# EAGLE board Board1 (EAGLE 4.16)
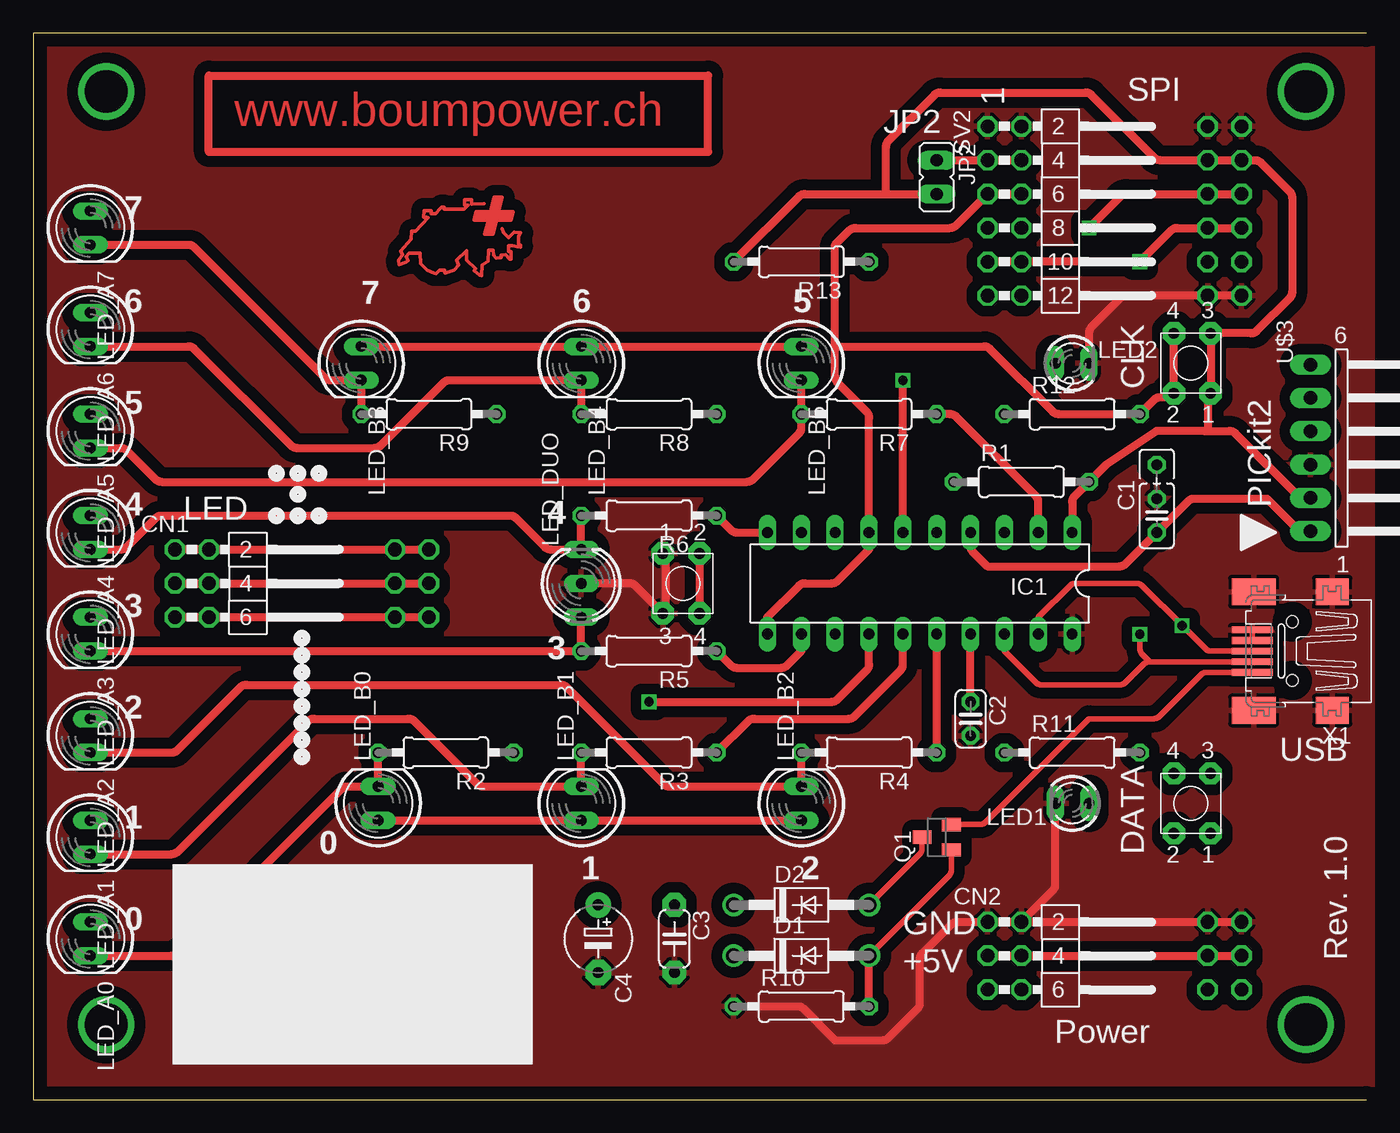
[diagram p0: board, top side]
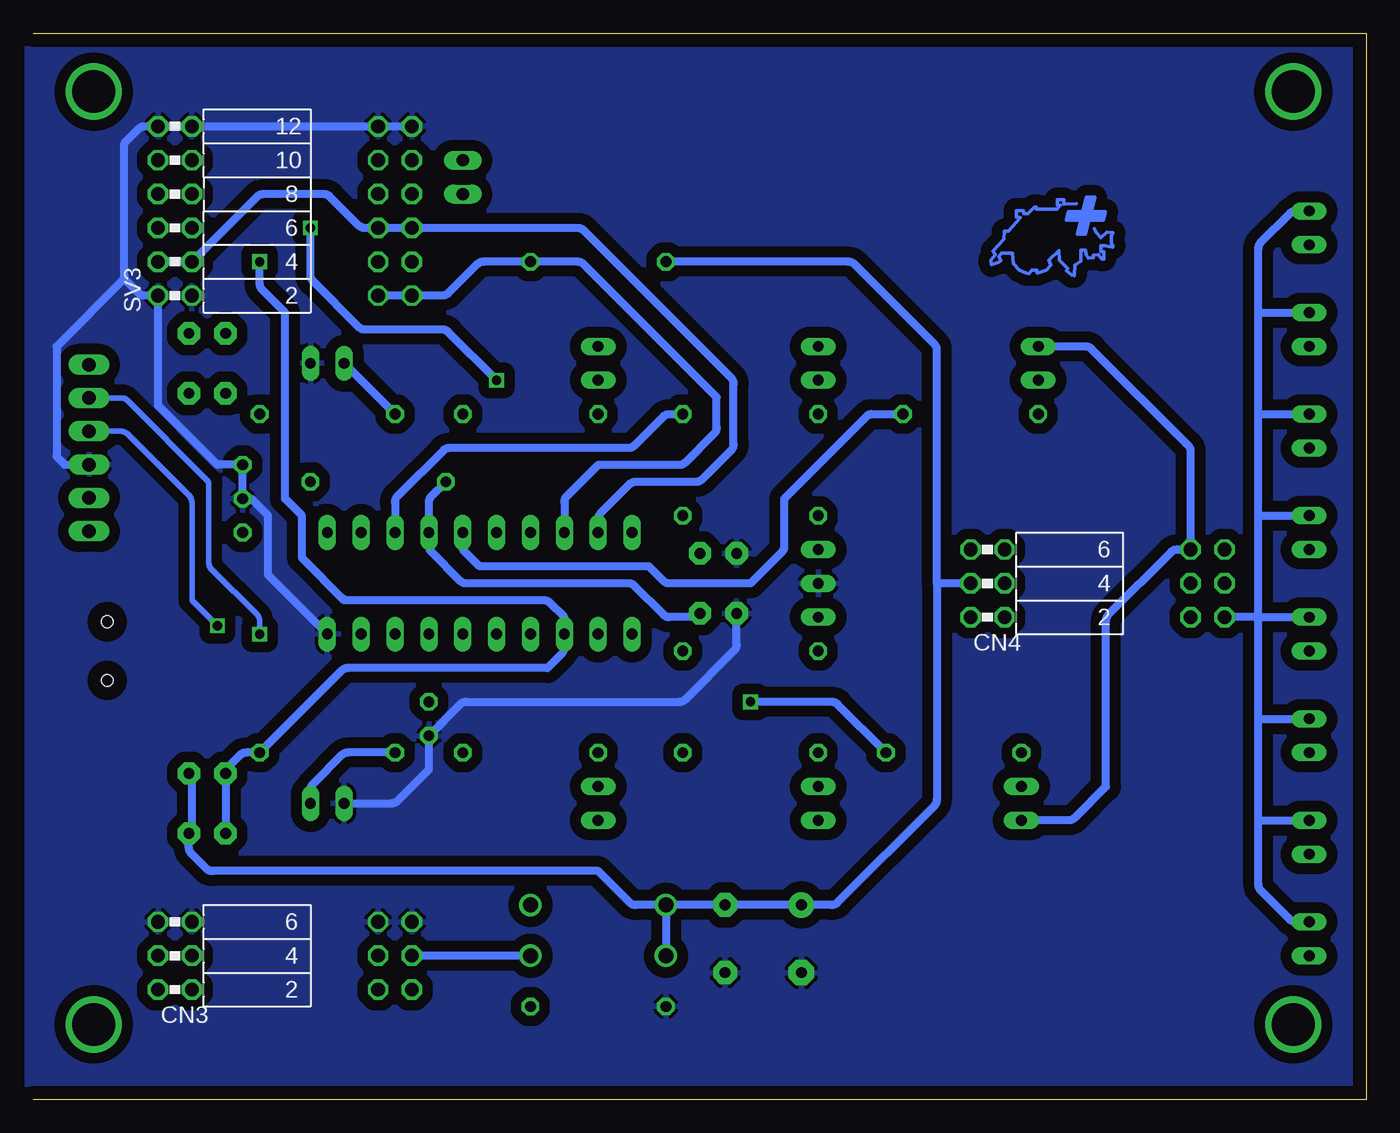
[diagram p1: board, bottom side, seen from below]

Size 100 x 80 mm. Coordinates in mm from the lower left corner, seen from the top.
Outline: 100,0 0,0 0,80 100,80
Copper layers (1*16): Top 0.035mm / dielectric 1.5mm / Bottom 0.035mm
Design rules "Olimex 10mils": minimum track width 10mil, minimum drill 24mil, track to track 10mil, track to pad 10mil, pad to pad 10mil, via to via 10mil, smd to smd 10mil, copper to edge 40mil, drill to drill 10mil, minimum pad ring 10mil, minimum via ring 8mil, stop-mask expansion 0mil, vias tented up to drill 0mil, thermal gap 10mil

## Footprints (pad centres in the part's own frame; a part is rotated, then mirrored left to right if it is on the bottom)
C025_050-025X075 = drill 0.813 octagon: 1 -1.27,0; 2 1.27,0; 3 3.81,0
C025-024X044 = drill 0.813 octagon: 1 -1.27,0; 2 1.27,0
C050-024X044 = drill 0.813 pad 1.778 octagon: 1 -2.54,0; 2 2.54,0
E5-5 = drill 0.813 pad 1.905 round: + -2.54,0 | drill 0.813 pad 1.905 octagon: - 2.54,0
JPM = drill 0.813 pad 1.676 octagon: P$1 -1.5,2.25; P$2 1.25,2.25; P$3 -1.5,-2.25; P$4 1.25,-2.25
MA03-2W = drill 1.016 octagon: 1 -2.54,-1.27; 2 -2.54,1.27; 3 0,-1.27; 4 0,1.27; 5 2.54,-1.27; 6 2.54,1.27
FE03-2W = drill 1.016 octagon: 1 -2.54,1.27; 2 -2.54,-1.27; 3 0,1.27; 4 0,-1.27; 5 2.54,1.27; 6 2.54,-1.27
DO41-10 = drill 1.118 round: A 5.08,0; C -5.08,0
DIL20 = drill 0.813 long: 1 -11.43,-3.81; 2 -8.89,-3.81; 3 -6.35,-3.81; 4 -3.81,-3.81; 5 -1.27,-3.81; 6 1.27,-3.81; 7 3.81,-3.81; 8 6.35,-3.81; 9 8.89,-3.81; 10 11.43,-3.81; 11 11.43,3.81; 12 8.89,3.81; 13 6.35,3.81; 14 3.81,3.81; 15 1.27,3.81; 16 -1.27,3.81; 17 -3.81,3.81; 18 -6.35,3.81; 19 -8.89,3.81; 20 -11.43,3.81
JP1 = drill 0.914 long: 1 0,-1.27; 2 0,1.27
LED3MM = drill 0.813 long: A -1.27,0; K 1.27,0
LED5MM = drill 0.813 long: A -1.27,0; K 1.27,0
DUOLED5MM = drill 0.813 long: AG -2.54,0; AR 2.54,0; K 0,0
SOT23 = smd 1 x 1.4: 1 -0.95,-1.1; 2 0.95,-1.1; 3 0,1.1
0207/10 = drill 0.813 octagon: 1 -5.08,0; 2 5.08,0
MA06-2W = drill 1.016 octagon: 1 -6.35,-1.27; 2 -6.35,1.27; 3 -3.81,-1.27; 4 -3.81,1.27; 5 -1.27,-1.27; 6 -1.27,1.27; 7 1.27,-1.27; 8 1.27,1.27; 9 3.81,-1.27; 10 3.81,1.27; 11 6.35,-1.27; 12 6.35,1.27
FE06-2W = drill 1.016 octagon: 1 -6.35,1.27; 2 -6.35,-1.27; 3 -3.81,1.27; 4 -3.81,-1.27; 5 -1.27,1.27; 6 -1.27,-1.27; 7 1.27,1.27; 8 1.27,-1.27; 9 3.81,1.27; 10 3.81,-1.27; 11 6.35,1.27; 12 6.35,-1.27
PICKIT2 = drill 1.016 long: 1 6.25,-6.25; 2 3.75,-6.25; 3 1.25,-6.25; 4 -1.25,-6.25; 5 -3.75,-6.25; 6 -6.25,-6.25
32005-201 = smd 3.1 x 0.5: 1 3,1.6; 2 3,0.8; 3 3,0; 4 3,-0.8; 5 3,-1.6 | smd 2.5 x 2: M1 -3,-4.45; M2 -3,4.45 | smd 3.3 x 2: M3 2.9,4.45; M4 2.9,-4.45 | hole 0.9: 0,2.2; 0,-2.2

## Placement (x,y rotation side)
C1  0.1 uF  [C025_050-025X075]  84.29,43.81 90 top
C2  470 nF  [C025-024X044]  70.32,28.57 270 top
C3  100nf  [C050-024X044]  48.09,12.06 270 top
C4  10uF  [E5-5]  42.38,12.06 270 top
CLK  [JPM]  86.83,55.24 180 top
CN1  [MA03-2W]  11.9,38.73 270 top
CN2  [MA03-2W]  72.86,10.79 270 top
CN3  [FE03-2W]  89.37,10.79 90 bottom
CN4  [FE03-2W]  28.41,38.73 90 bottom
D1  1N5817  [DO41-10]  57.62,10.79 0 top
D2  1N5817  [DO41-10]  57.62,14.6 0 top
DATA  [JPM]  86.83,22.22 180 top
IC1  MICROCHIP_PIC18F1XK50I/P  [DIL20]  66.51,38.73 180 top
JP2  [JP1]  67.78,69.21 180 top
LED1  [LED3MM]  77.94,22.22 180 top
LED2  [LED3MM]  77.94,55.24 0 top
LED_A0  [LED5MM]  4.28,12.06 270 top
LED_A1  [LED5MM]  4.28,19.68 270 top
LED_A2  [LED5MM]  4.28,27.3 270 top
LED_A3  [LED5MM]  4.28,34.92 270 top
LED_A4  [LED5MM]  4.28,42.54 270 top
LED_A5  [LED5MM]  4.28,50.16 270 top
LED_A6  [LED5MM]  4.28,57.78 270 top
LED_A7  [LED5MM]  4.28,65.4 270 top
LED_B0  [LED5MM]  25.87,22.22 90 top
LED_B1  [LED5MM]  41.11,22.22 90 top
LED_B2  [LED5MM]  57.62,22.22 90 top
LED_B3  [LED5MM]  24.6,55.24 270 top
LED_B4  [LED5MM]  41.11,55.24 270 top
LED_B5  [LED5MM]  57.62,55.24 270 top
LED_DUO  [DUOLED5MM]  41.11,38.73 90 top
Q1  BSS84  [SOT23]  67.78,19.68 90 top
R1  10K  [0207/10]  74.13,46.35 0 top
R2  [0207/10]  30.95,26.03 180 top
R3  [0207/10]  46.19,26.03 180 top
R4  [0207/10]  62.7,26.03 180 top
R5  [0207/10]  46.19,33.65 180 top
R6  [0207/10]  46.19,43.81 180 top
R7  [0207/10]  62.7,51.43 180 top
R8  [0207/10]  46.19,51.43 180 top
R9  [0207/10]  29.68,51.43 180 top
R10  33k  [0207/10]  57.62,6.98 0 top
R11  470  [0207/10]  77.94,26.03 0 top
R12  470  [0207/10]  77.94,51.43 0 top
R13  33K  [0207/10]  57.62,62.86 180 top
RESET  [JPM]  48.73,38.73 0 top
SV2  [MA06-2W]  72.86,66.67 270 top
SV3  [FE06-2W]  89.37,66.67 90 bottom
U$1  SUISSE  [SUISSE]  23.33,64.77 0 bottom
U$3  PIC-ICSPMICROCHIP  [PICKIT2]  102.07,48.89 270 top
U$15  SUISSE  [SUISSE]  32.22,64.77 0 top
X1  USB  [32005-201]  94.45,33.65 180 top

## Library data of the parts
C1-C4 R1-R13 = rcl
CLK DATA RESET = BP_Switches
CN1-CN4 SV2 SV3 = untitled
D1 D2 = diode
IC1 = PIC18F1xK50
JP2 = jumper
LED1 LED2 LED_A0 LED_A1-LED_A7 LED_B0 LED_B1-LED_B5 = BP_LED
LED_DUO = led
Q1 = transistor-small-signal
U$1 U$15 = BP_Symbol
U$3 = GB-Extentions
X1 = con-cypressindustries

## Nets
ALIM: CN2.3 CN2.4 CN3.3 CN3.4 D1.A Q1.1 R10.2
CLK: CLK.P$2 CLK.P$4 IC1.7 IC1.11 R12.2 SV2.5 SV2.6
CLK-OUT: IC1.6 SV3.7 SV3.8
D+: IC1.19 U$3.4 X1.3
D-: IC1.18 U$3.5 X1.2
MCLR#: C1.1 IC1.4 R1.1 RESET.P$2 RESET.P$4 U$3.1
N$1: D2.A Q1.3
N$2: JP2.1 SV2.3 SV2.4
N$3: LED1.A R11.1
N$4: Q1.2 X1.1
N$5: LED2.A R12.1
N$15: CN1.1 CN1.2 CN4.5 CN4.6 LED_B0.A LED_B1.A LED_B2.A LED_B3.A LED_B4.A LED_B5.A
N$16: CN1.5 CN1.6 CN4.1 CN4.2 LED_A0.A LED_A1.A LED_A2.A LED_A3.A LED_A4.A LED_A5.A LED_A6.A LED_A7.A
OUT0: LED_A0.K LED_B0.K R2.2
OUT1: LED_A1.K LED_B1.K R3.2
OUT2: LED_A2.K LED_B2.K R4.2
OUT3: LED_A3.K LED_DUO.AG R5.2
OUT4: LED_A4.K LED_DUO.AR R6.2
OUT5: LED_A5.K LED_B5.K R7.2
OUT6: LED_A6.K LED_B4.K R8.2
OUT7: LED_A7.K LED_B3.K R9.2
PE: C1.2 C2.2 C3.2 C4.- CN2.1 CN2.2 CN3.5 CN3.6 IC1.20 LED1.K LED2.K LED_DUO.K R10.1 RESET.P$1 RESET.P$3 SV2.1 SV2.2 SV3.1 SV3.2 SV3.11 SV3.12 U$3.3 X1.4 X1.5 X1.M1 X1.M2 X1.M3 X1.M4
Q0: IC1.14 R2.1
Q1: IC1.15 R3.1
Q2: IC1.16 R4.1
Q3: IC1.12 R5.1
Q4: IC1.10 R6.1
Q5: IC1.2 R7.1
Q6: IC1.3 R8.1
Q7: IC1.5 R9.1
SI: DATA.P$2 DATA.P$4 IC1.13 R11.2 SV2.9 SV2.10 SV3.5 SV3.6
SO: IC1.9 SV2.7 SV2.8 SV3.3 SV3.4
SS#: IC1.8 R13.1 SV2.11 SV2.12
VDD: C3.1 C4.+ CLK.P$1 CLK.P$3 CN1.3 CN1.4 CN4.3 CN4.4 D1.C D2.C DATA.P$1 DATA.P$3 IC1.1 JP2.2 R1.2 R13.2 SV3.9 SV3.10 U$3.2
VUSB: C2.1 IC1.17

## Tracks (layer width: path | path; a pad name or v marks a point on that pad's centre or on a via)
ALIM
  Top 0.406: Q1.1 68.88,17.23 arc-45 68.69,16.78 D1.A
  Top 0.61: CN2.3 CN2.4 CN3.4 CN3.3 | R10.2 D1.A
  Bottom 0.61: D1.A CN2.3
CLK
  Top 0.61: SV2.6 SV2.5 69.24,65.59 arc-45 68.79,65.4 61.69,65.4 arc45 61.24,65.21 60.16,64.13 60.16,56.51 | 60.16,56.51 60.16,54.23 arc45 60.35,53.78 62.51,51.62 arc-45 62.7,51.17 IC1.7 62.7,41.27 60.35,38.92 arc-45 59.9,38.73 57.88,38.73 arc45 57.43,38.54 55.08,36.19 IC1.11 | 60.16,56.51 71.33,56.51 arc-45 71.78,56.32 76.48,51.62 arc45 76.93,51.43 R12.2 84.1,52.51 arc-45 84.55,52.7 85.56,52.7 85.56,52.94 arc-45 CLK.P$2 arc-45 85.56,53.04 85.56,57.54 | 85.56,57.54 85.56,57.78 | 85.56,57.54 arc45 CLK.P$4
CLK-OUT  (via drill 0.7)
  Top 0.61: SV3.7 SV3.8 82.01,67.94 arc45 81.56,67.75 v79.21,65.4 | IC1.6 v65.24,53.97
  Bottom 0.61: v65.24,53.97 68.86,57.59 arc-45 69.31,57.78 75.14,57.78 arc45 75.59,57.97 79.02,61.4 arc45 79.21,61.85 v79.21,65.4
D+  (via drill 0.7)
  Top 0.406: X1.3 88.36,33.65 arc-45 87.91,33.84 v86.19,35.55 83.21,38.54 arc45 82.76,38.73 78.2,38.73 arc45 77.75,38.54 75.4,36.19 IC1.19
  Bottom 0.406: U$3.4 93.42,50.14 arc45 92.97,49.95 88.29,45.27 arc45 88.1,44.82 88.1,37.46 v86.19,35.55
D-  (via drill 0.7)
  Top 0.406: 83.75,32.85 X1.2 | 83.75,32.85 arc45 83.3,32.66 81.94,31.3 arc-45 81.49,31.11 75.66,31.11 arc-45 75.21,31.3 72.86,33.65 IC1.18 | 83.75,32.85 83.21,33.4 arc-45 83.02,33.85 v83.02,34.92
  Bottom 0.406: U$3.5 93.38,52.64 arc45 92.93,52.45 87.02,46.54 arc45 86.83,46.09 86.83,40.26 arc-45 86.64,39.81 83.21,36.38 arc45 83.02,35.93 v83.02,34.92
MCLR#
  Top 0.61: 50,41.03 50,41.27 | 50,41.03 arc-45 RESET.P$2 | RESET.P$4 arc45 50,36.53 50,41.03 | IC1.4 70.32,41.53 arc45 70.51,41.08 71.59,40 81.49,40 arc45 81.94,40.19 C1.1 86.64,44.89 arc-45 87.09,45.08 92.55,45.08 94.9,42.73 arc45 95.35,42.54 95.72,42.54 U$3.1
  Bottom 0.61: RESET.P$4 arc-45 50,36.43 50,36.19 52.28,36.19 arc45 52.73,36.38 54.89,38.54 arc-45 55.34,38.73 67.52,38.73 arc45 67.97,38.92 70.13,41.08 arc45 70.32,41.53 IC1.4 70.32,44.82 arc45 70.13,45.27 R1.1
N$1
  Top 0.406: Q1.3 66.68,18.84 arc-45 66.49,18.39 D2.A
N$2
  Top 0.61: SV2.4 SV2.3 JP2.1
N$3
  Bottom 0.61: R11.1 76.41,26.03 arc-45 76.86,25.84 79.02,23.68 arc-45 79.21,23.23 LED1.A
N$4
  Top 0.406: X1.1 88.03,32.05 arc45 87.58,31.86 84.48,28.76 arc-45 84.03,28.57 79.21,28.57 71.46,20.82 arc-45 71.01,20.63 Q1.2
N$5
  Bottom 0.61: R12.1 LED2.A
N$6  (via drill 3.2 pad 0.41)
  other vias: 5.47,5.63
N$7  (via drill 3.2 pad 0.41)
  other vias: 5.47,75.63
N$8  (via drill 3.2 pad 0.41)
  other vias: 95.47,75.63
N$9  (via drill 3.2 pad 0.41)
  other vias: 95.47,5.63
N$10
  Top 0.61: 13.17,71.11 50.63,71.11 50.63,76.83 13.17,76.83 13.17,71.11
N$15
  Top 0.61: CN4.5 CN4.6 CN1.2 CN1.1 | LED_B3.A LED_B4.A LED_B5.A | LED_B0.A LED_B1.A LED_B2.A
  Bottom 0.61: LED_B3.A 21.05,56.51 arc45 20.6,56.32 13.36,49.08 arc45 13.17,48.63 CN1.2 14.18,41.27 arc-45 14.63,41.08 19.33,36.38 arc-45 19.52,35.93 19.52,23.49 21.87,21.14 arc45 22.32,20.95 LED_B0.A
N$16
  Top 0.61: CN1.5 CN1.6 CN4.2 CN4.1
  Bottom 0.61: 8.09,36.19 LED_A3.A | 8.09,36.19 CN1.5 | LED_A7.A 5.29,66.67 arc-45 5.74,66.48 7.9,64.32 arc-45 8.09,63.87 8.09,59.05 | 8.09,36.19 8.09,43.81 | 8.09,43.81 8.09,51.43 | 8.09,51.43 8.09,59.05 | 8.09,59.05 LED_A6.A | 8.09,51.43 LED_A5.A | 8.09,43.81 LED_A4.A | LED_A0.A 5.29,13.33 arc45 5.74,13.52 7.9,15.68 arc45 8.09,16.13 8.09,20.95 | 8.09,20.95 8.09,28.57 | 8.09,28.57 8.09,36.19 | 8.09,20.95 LED_A1.A | 8.09,28.57 LED_A2.A
OUT0
  Top 0.61: LED_A0.K 10.37,10.79 arc45 10.82,10.98 23.14,23.3 arc-45 23.59,23.49 LED_B0.K R2.2
OUT1
  Top 0.61: R3.2 LED_B1.K 33.75,23.49 arc-45 33.3,23.68 28.6,28.38 arc45 28.15,28.57 21.05,28.57 arc45 20.6,28.38 10.82,18.6 arc-45 10.37,18.41 LED_A1.K
OUT2
  Top 0.61: R4.2 LED_B2.K 47.72,23.49 arc-45 47.27,23.68 40.03,30.92 arc45 39.58,31.11 15.97,31.11 arc45 15.52,30.92 10.82,26.22 arc-45 10.37,26.03 LED_A2.K
OUT3
  Top 0.61: LED_A3.K R5.2 LED_DUO.AG
OUT4
  Top 0.61: LED_A4.K 6.56,41.27 arc45 7.01,41.46 9.17,43.62 arc-45 9.62,43.81 35.77,43.81 arc-45 36.22,43.62 38.38,41.46 arc45 38.83,41.27 LED_DUO.AR R6.2
OUT5
  Top 0.61: LED_A5.K 6.56,48.89 arc-45 7.01,48.7 9.17,46.54 arc45 9.62,46.35 53.55,46.35 arc45 54,46.54 57.43,49.97 arc45 57.62,50.42 R7.2 LED_B5.K
OUT6
  Top 0.61: R8.2 LED_B4.K 31.21,53.97 arc45 30.76,53.78 26.06,49.08 arc-45 25.61,48.89 19.78,48.89 arc-45 19.33,49.08 12.09,56.32 arc45 11.64,56.51 LED_A6.K
OUT7
  Top 0.61: R9.2 LED_B3.K 22.32,53.97 arc-45 21.87,54.16 12.09,63.94 arc45 11.64,64.13 LED_A7.K
PE
  Top 0.406: 91.47,34.45 X1.4 91.45,35.24 | 91.47,35.25 X1.5 91.45,35.24 | 91.45,35.24 91.59,35.24
  Top 0.61: LED_DUO.K 44.72,38.73 arc-45 45.17,38.54 RESET.P$3 47.27,36.52 arc45 47.46,36.97 47.46,41.27 arc-45 47.42,41.17 RESET.P$1 | SV3.1 SV3.2 82.01,60.32 arc45 81.56,60.13 79.4,57.97 arc45 79.21,57.52 LED2.K | CN2.2 CN2.1 69.31,13.33 arc45 68.86,13.14 66.7,10.98 arc45 66.51,10.53 66.51,7.24 arc-45 66.32,6.79 64.16,4.63 arc-45 63.71,4.44 60.16,4.44 57.81,6.79 arc45 57.36,6.98 R10.1 | CN3.5 CN3.6 CN2.2 | CN2.2 76.48,15.68 arc45 76.67,16.13 LED1.K
  Bottom 0.61: RESET.P$3 47.23,34.14 arc45 47.42,33.69 51.08,30.03 arc45 51.53,29.84 67.52,29.84 arc-45 67.97,29.65 C2.2 70.32,24.76 72.67,22.41 arc45 73.12,22.22 LED1.K | SV2.1 SV2.2 SV3.12 SV3.11 91.65,73.02 arc-45 92.1,72.83 93.18,71.75 93.18,61.85 arc-45 92.99,61.4 | 92.99,61.4 91.91,60.32 SV3.1 90.64,52.07 86.2,47.63 84.47,47.63 84.29,47.45 C1.2 83.66,45.08 82.39,43.81 82.39,39.37 IC1.20 | U$3.3 97.64,47.64 98.26,48.26 98.26,56.51 93.18,61.59 92.99,61.4
  pour Bottom (isolate 0.813): 0.47,0.63 0.47,80.63 100.47,80.63 100.47,0.63
  pour Top (isolate 0.813): 0.47,0.63 0.47,80.63 100.47,80.63 100.47,0.63
Q0  (via drill 0.7)
  Top 0.61: v46.19,29.84 59.9,29.84 arc45 60.35,30.03 62.51,32.19 arc45 62.7,32.64 IC1.14
  Bottom 0.61: R2.1 39.65,29.65 arc-45 40.1,29.84 v46.19,29.84
Q1
  Top 0.61: IC1.15 65.24,32.64 arc-45 65.05,32.19 61.62,28.76 arc-45 61.17,28.57 54.07,28.57 arc45 53.62,28.38 R3.1
Q2
  Top 0.61: R4.1 IC1.16
Q3
  Top 0.61: IC1.12 57.62,33.65 56.54,32.57 arc-45 56.09,32.38 52.8,32.38 arc-45 52.35,32.57 R5.1
Q4
  Top 0.61: IC1.10 52.8,42.54 arc-45 52.35,42.73 R6.1
Q5
  Top 0.61: R7.1 68.79,51.43 arc-45 69.24,51.24 75.21,45.27 arc-45 75.4,44.82 IC1.2
Q6
  Bottom 0.61: R8.1 52.28,51.43 arc-45 52.73,51.24 54.89,49.08 arc45 55.34,48.89 68.79,48.89 arc-45 69.24,48.7 72.67,45.27 arc-45 72.86,44.82 IC1.3
Q7
  Bottom 0.61: IC1.5 67.78,41.27 66.51,40 53.81,40 52.73,38.92 arc-45 52.28,38.73 46.19,38.73 43.84,41.08 arc-45 43.65,41.53 43.65,45.08 37.3,51.43 37.04,51.43 | 37.04,51.43 R9.1 | 37.04,51.43 arc-45 37.49,51.24
SI  (via drill 0.7)
  Top 0.61: SV2.9 SV2.10 v83.02,62.86 85.37,65.21 arc-45 85.82,65.4 SV3.6 SV3.5
  Bottom 0.61: 85.56,24.76 arc-45 85.58,24.71 | 85.56,24.76 84.48,25.84 arc45 84.03,26.03 R11.2 76.86,32.19 arc45 76.41,32.38 61.43,32.38 60.35,33.46 arc-45 60.16,33.91 IC1.13 60.16,36.19 61.24,37.27 arc-45 61.69,37.46 76.41,37.46 | 85.56,24.76 arc-45 85.58,24.71 | 85.58,24.71 DATA.P$4 | 85.58,24.71 DATA.P$2 | 85.56,24.76 arc-45 85.58,24.71 | 76.41,37.46 arc45 76.86,37.65 | v83.02,62.86 83.02,61.22 arc-45 82.83,60.77 81.11,59.05 81.11,45.08 79.84,43.81 79.84,40.64 76.67,37.46 76.41,37.46
SO
  Bottom 0.61: IC1.9 57.62,43.55 arc45 57.43,44 55.27,46.16 arc45 54.82,46.35 50.26,46.35 arc-45 49.81,46.54 47.65,48.7 arc-45 47.46,49.15 47.46,53.71 arc-45 47.65,54.16 58.7,65.21 arc-45 59.15,65.4 SV2.7 SV2.8 75.14,65.4 arc45 75.59,65.59 77.75,67.75 arc-45 78.2,67.94 79.21,67.94 82.76,67.94 arc-45 83.21,67.75 SV3.4 SV3.3
SS#
  Bottom 0.61: IC1.8 60.16,44.82 arc45 59.97,45.27 57.62,47.62 51.53,47.62 arc-45 51.08,47.81 48.92,49.97 arc-45 48.73,50.42 48.73,52.7 58.7,62.67 arc-45 59.15,62.86 R13.1 66.25,62.86 arc-45 66.7,62.67 68.86,60.51 arc45 69.31,60.32 SV2.11 SV2.12
VDD
  Top 0.61: CN1.3 CN1.4 CN4.4 CN4.3 | 63.97,67.94 57.88,67.94 arc45 57.43,67.75 R13.2 | 63.97,67.94 JP2.2 | 63.97,67.94 63.97,71.49 arc-45 64.16,71.94 67.59,75.37 arc-45 68.04,75.56 78.95,75.56 arc-45 79.4,75.37 84.1,70.67 arc45 84.55,70.48 SV3.10 SV3.9 91.65,70.48 arc-45 92.1,70.29 94.26,68.13 arc-45 94.45,67.68 94.45,60.58 arc-45 94.26,60.13 91.81,57.68 arc-45 91.36,57.49 CLK.P$3 arc45 88.29,57.59 88.14,57.74 | IC1.1 77.94,44.82 arc-45 78.13,45.27 R1.2 80.48,47.62 84.29,50.16 87.84,50.16 | 88.14,57.74 arc-45 88.33,57.29 CLK.P$1 arc-45 88.29,52.89 88.29,52.89 arc45 88.1,52.44 88.1,50.16 87.84,50.16 | 88.14,57.74 88.1,57.78 | 95.72,45.08 arc45 95.79,45.11 | 87.84,50.16 89.74,50.16 arc-45 90.19,49.97 94.9,45.27 arc45 95.35,45.08 95.72,45.08 | 95.72,45.08 arc45 95.79,45.11 | 95.79,45.11 U$3.2
  Bottom 0.61: 32.22,38.73 32.22,22.48 arc45 32.41,22.03 39.65,14.79 arc45 40.1,14.6 C4.+ C3.1 D2.C | 32.22,38.73 32.22,56.25 arc-45 32.41,56.7 38.38,62.67 arc-45 38.83,62.86 R13.2 | CN4.3 32.22,38.73 | D2.C D1.C | D2.C 54.82,14.6 arc45 55.27,14.79 57.62,17.14 86.57,17.14 arc45 87.02,17.33 88.14,18.45 arc45 88.33,18.9 DATA.P$1 88.29,20.01 arc-45 88.1,20.46 88.1,24.76 arc45 88.14,24.66 DATA.P$3
VUSB
  Top 0.61: C2.1 IC1.17

## Text on the board
Top: www.boumpower.ch
_tSilk: JP2 | 1 | SPI | 7 | 7 | 6 | 6 | 5 | CLK | 5 | PICkit2 | 4 | LED | 4 | 3 | 3 | 2 | USB | 1 | 0 | DATA | 1 | 2 | 0 | GND | Rev. 1.0 | +5V | Power